# Altium PCB Altium_PCB_v03_CPU6502_4Plane.pcbdoc
Units mil, origin at the board's own origin, x right, y up, seen from the top; angles counter-clockwise.
Board outline 6299.21 x 6299.21 mil, 4 copper layers (Top Layer, GROUND, 5V, Bottom Layer); 26 components, 42 nets, 174 pads, 0 vias.
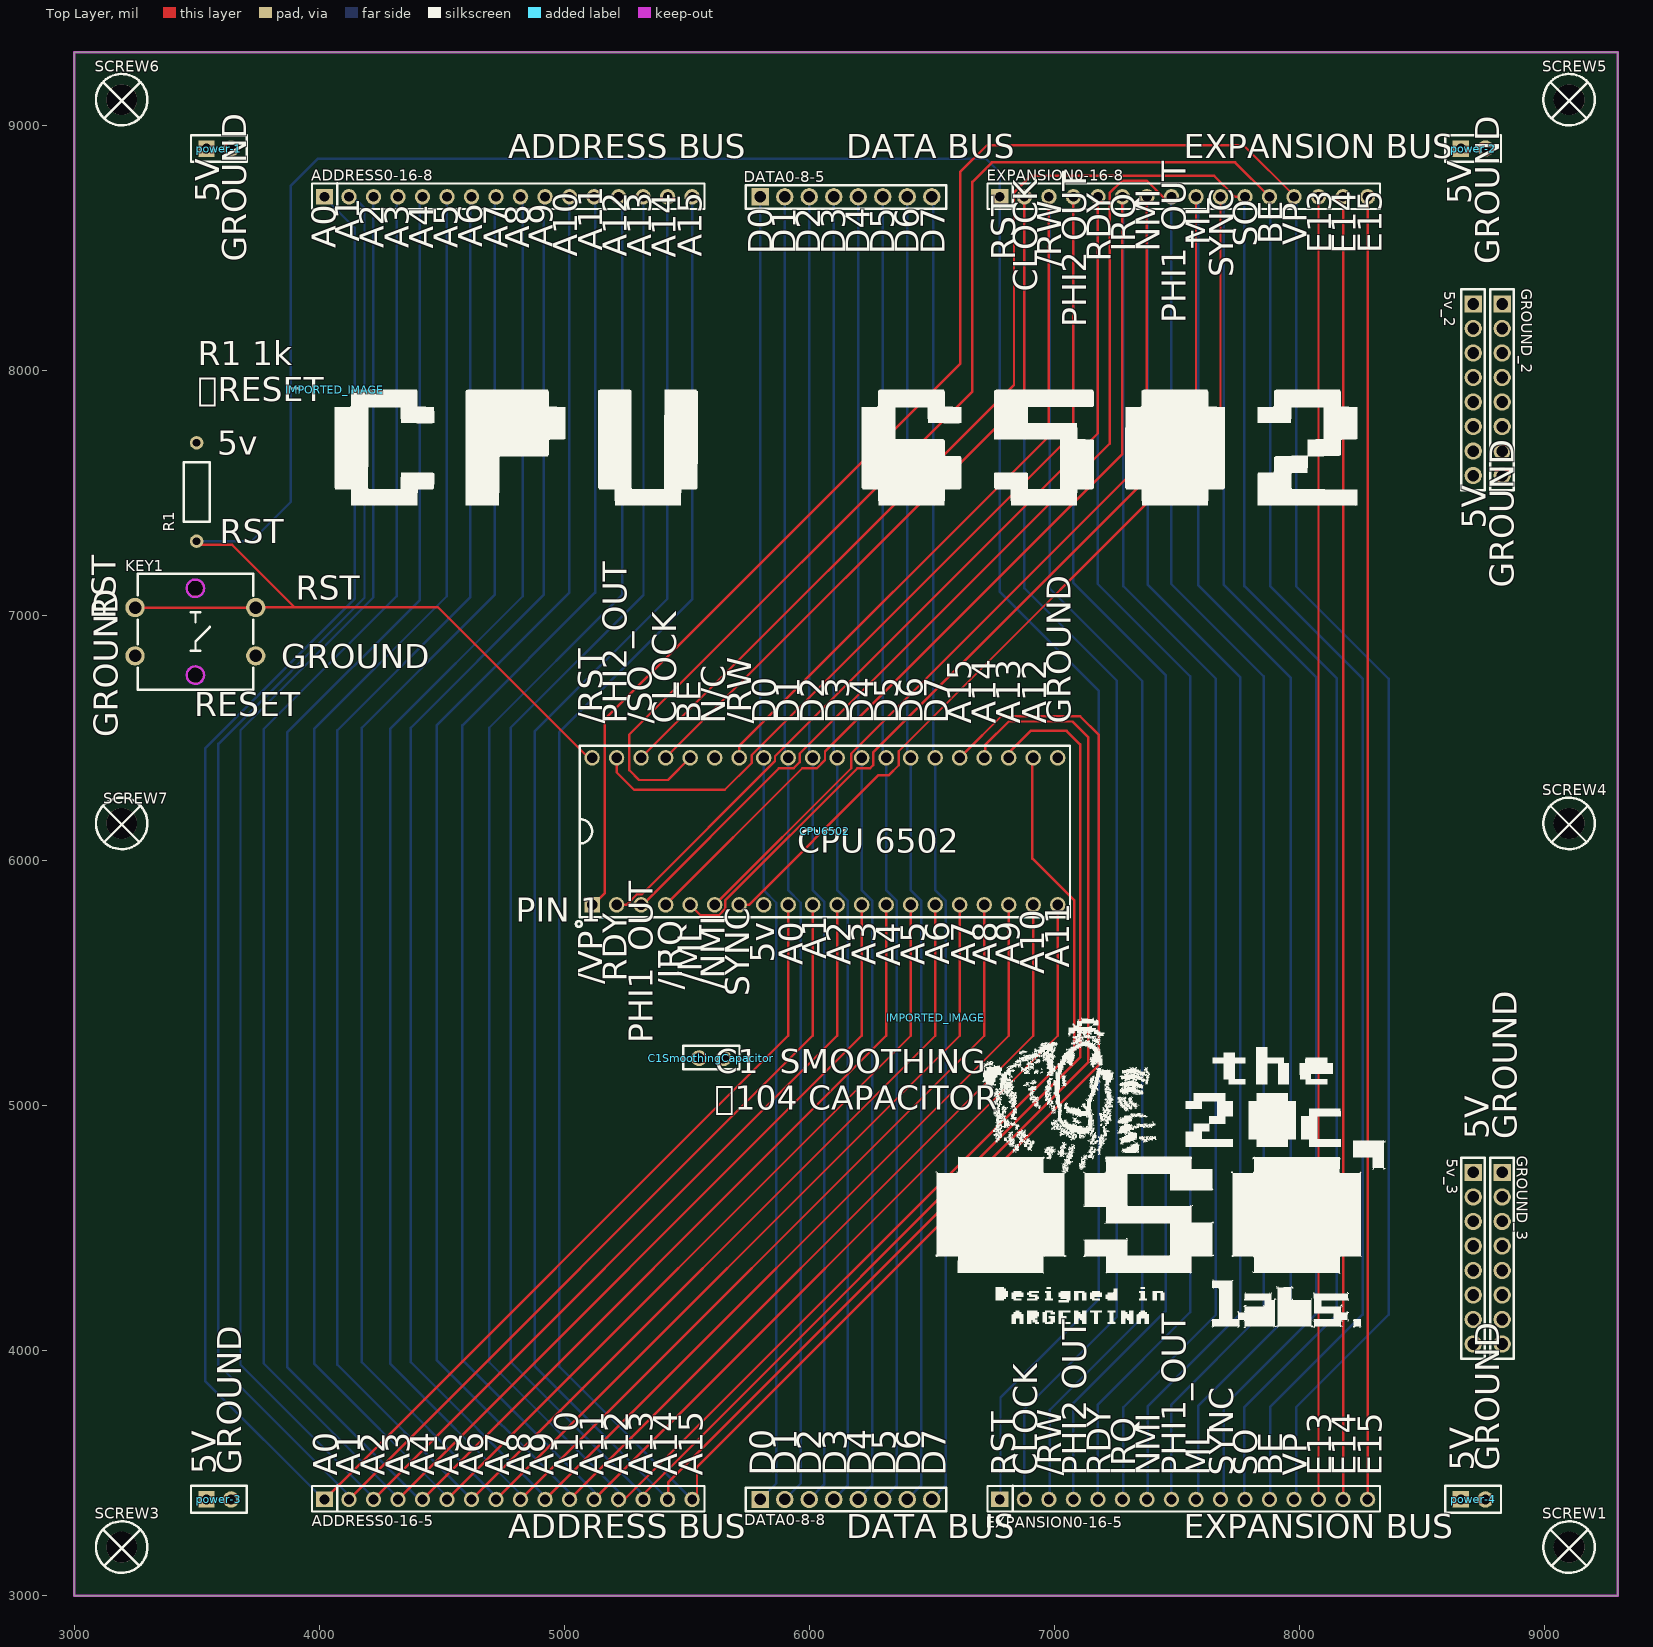
[diagram p0: Top Layer view]
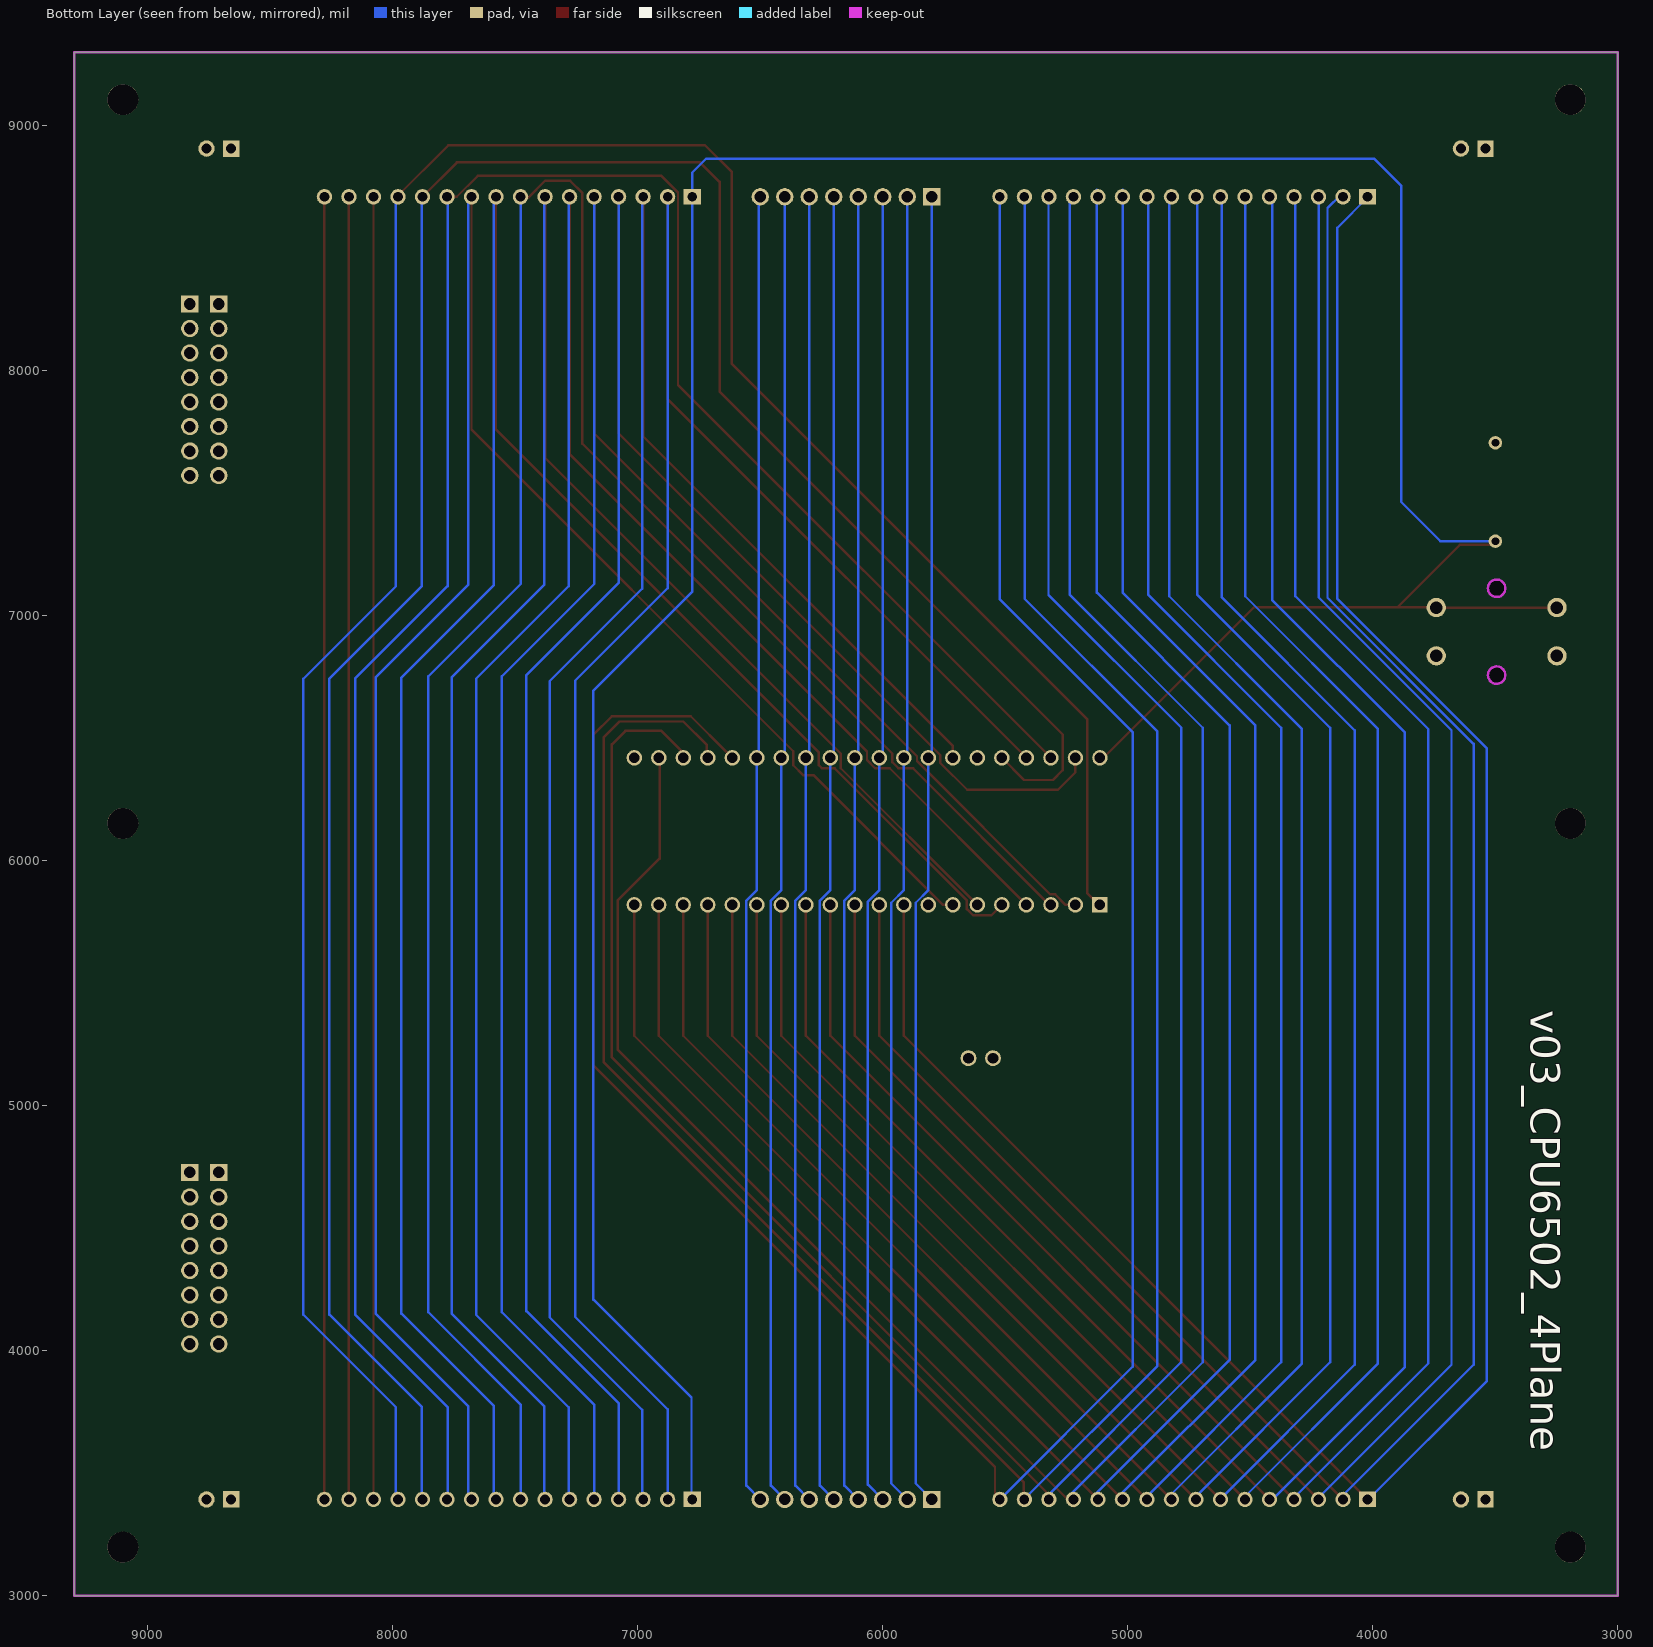
[diagram p1: Bottom Layer view, seen from below]
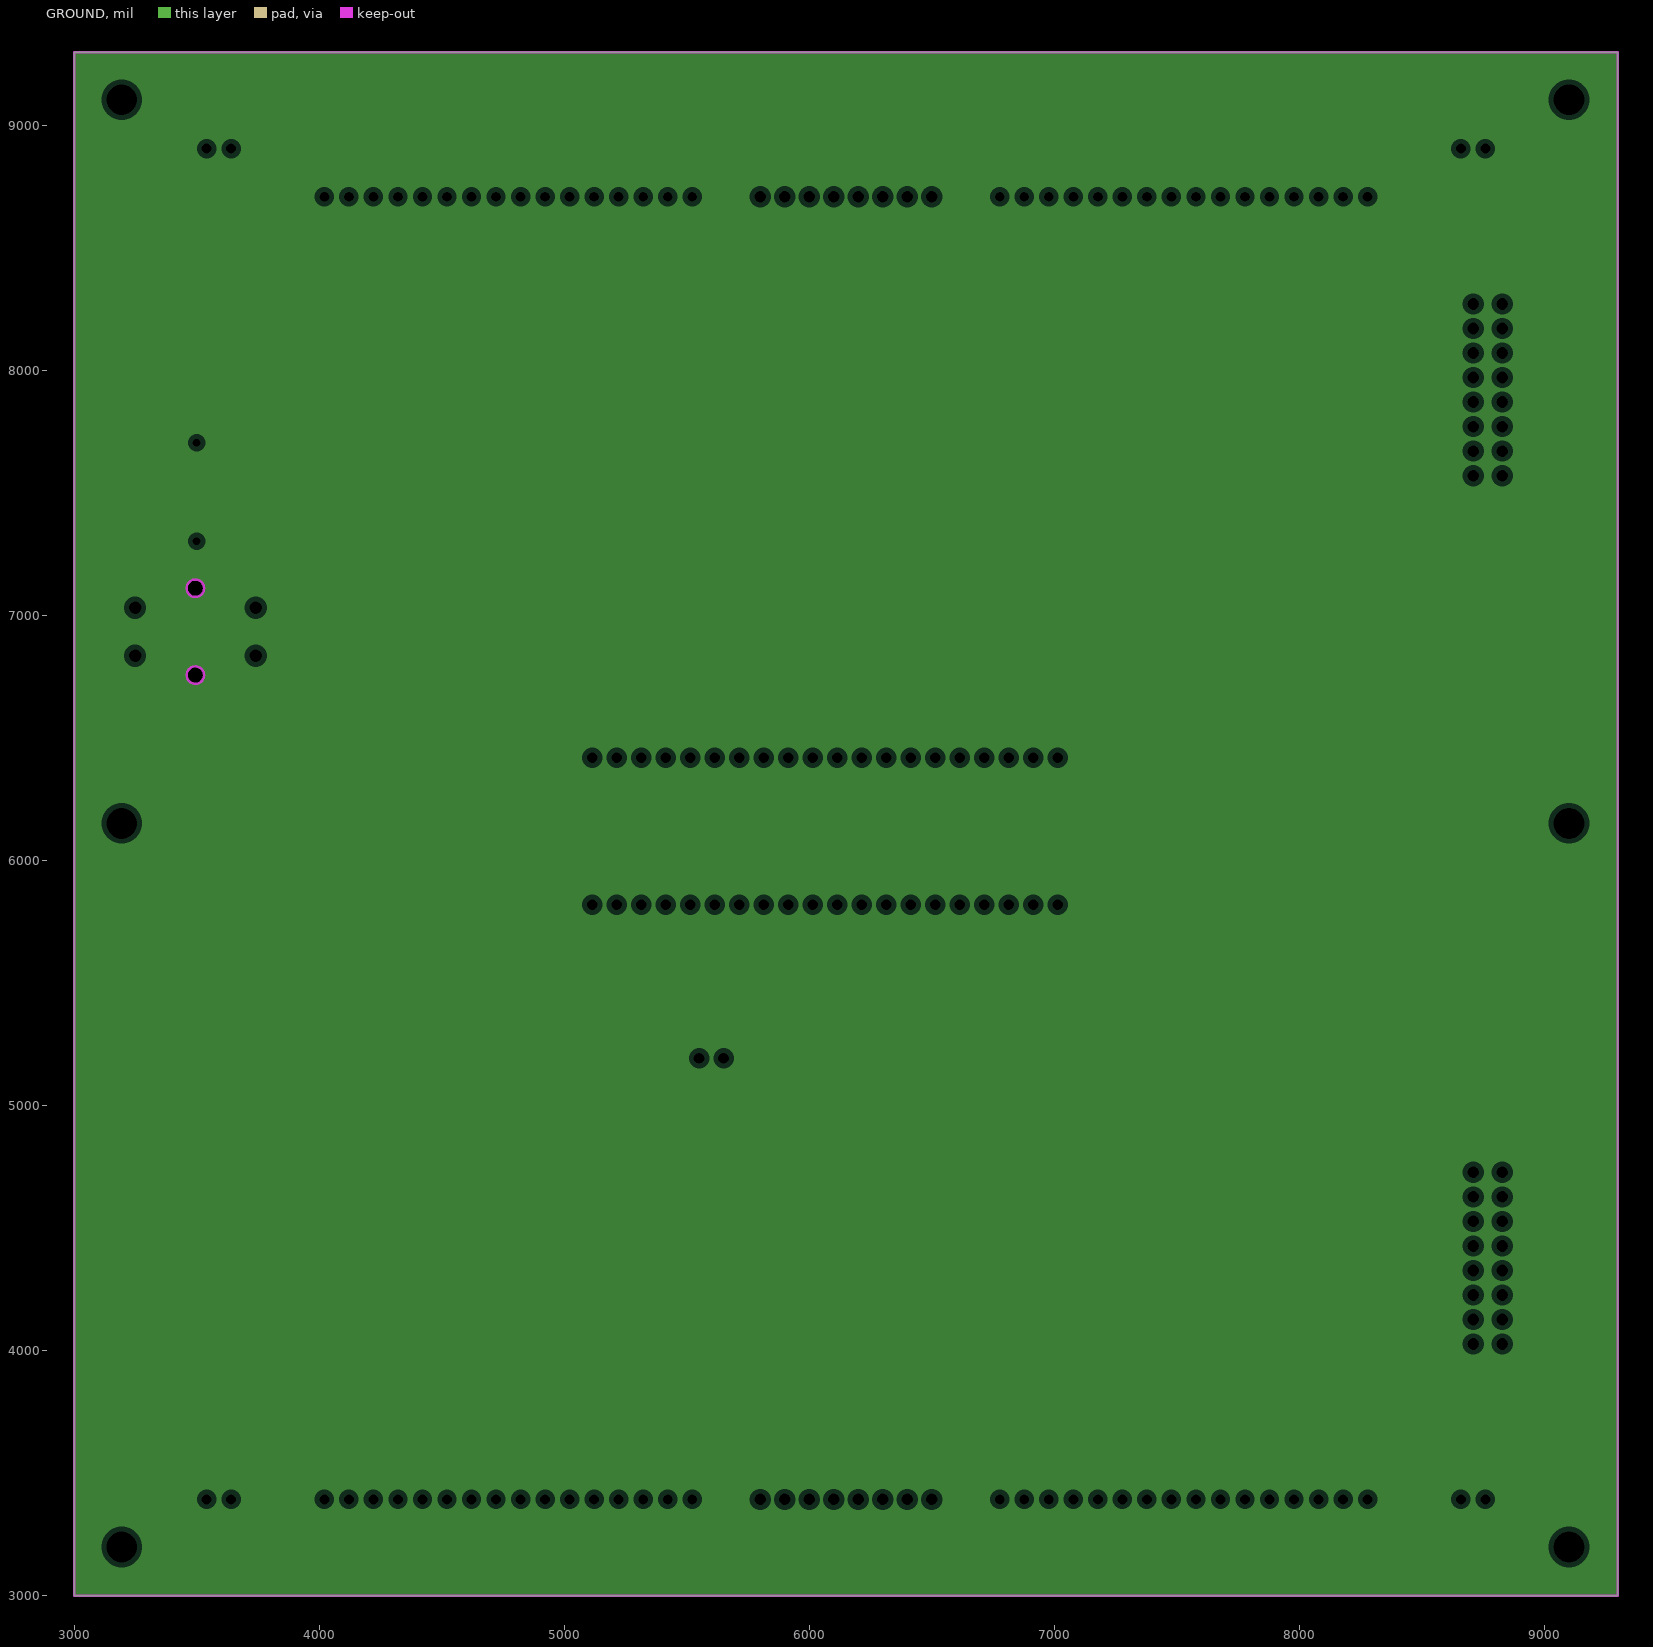
[diagram p2: GROUND, clearances drawn from the general rule]
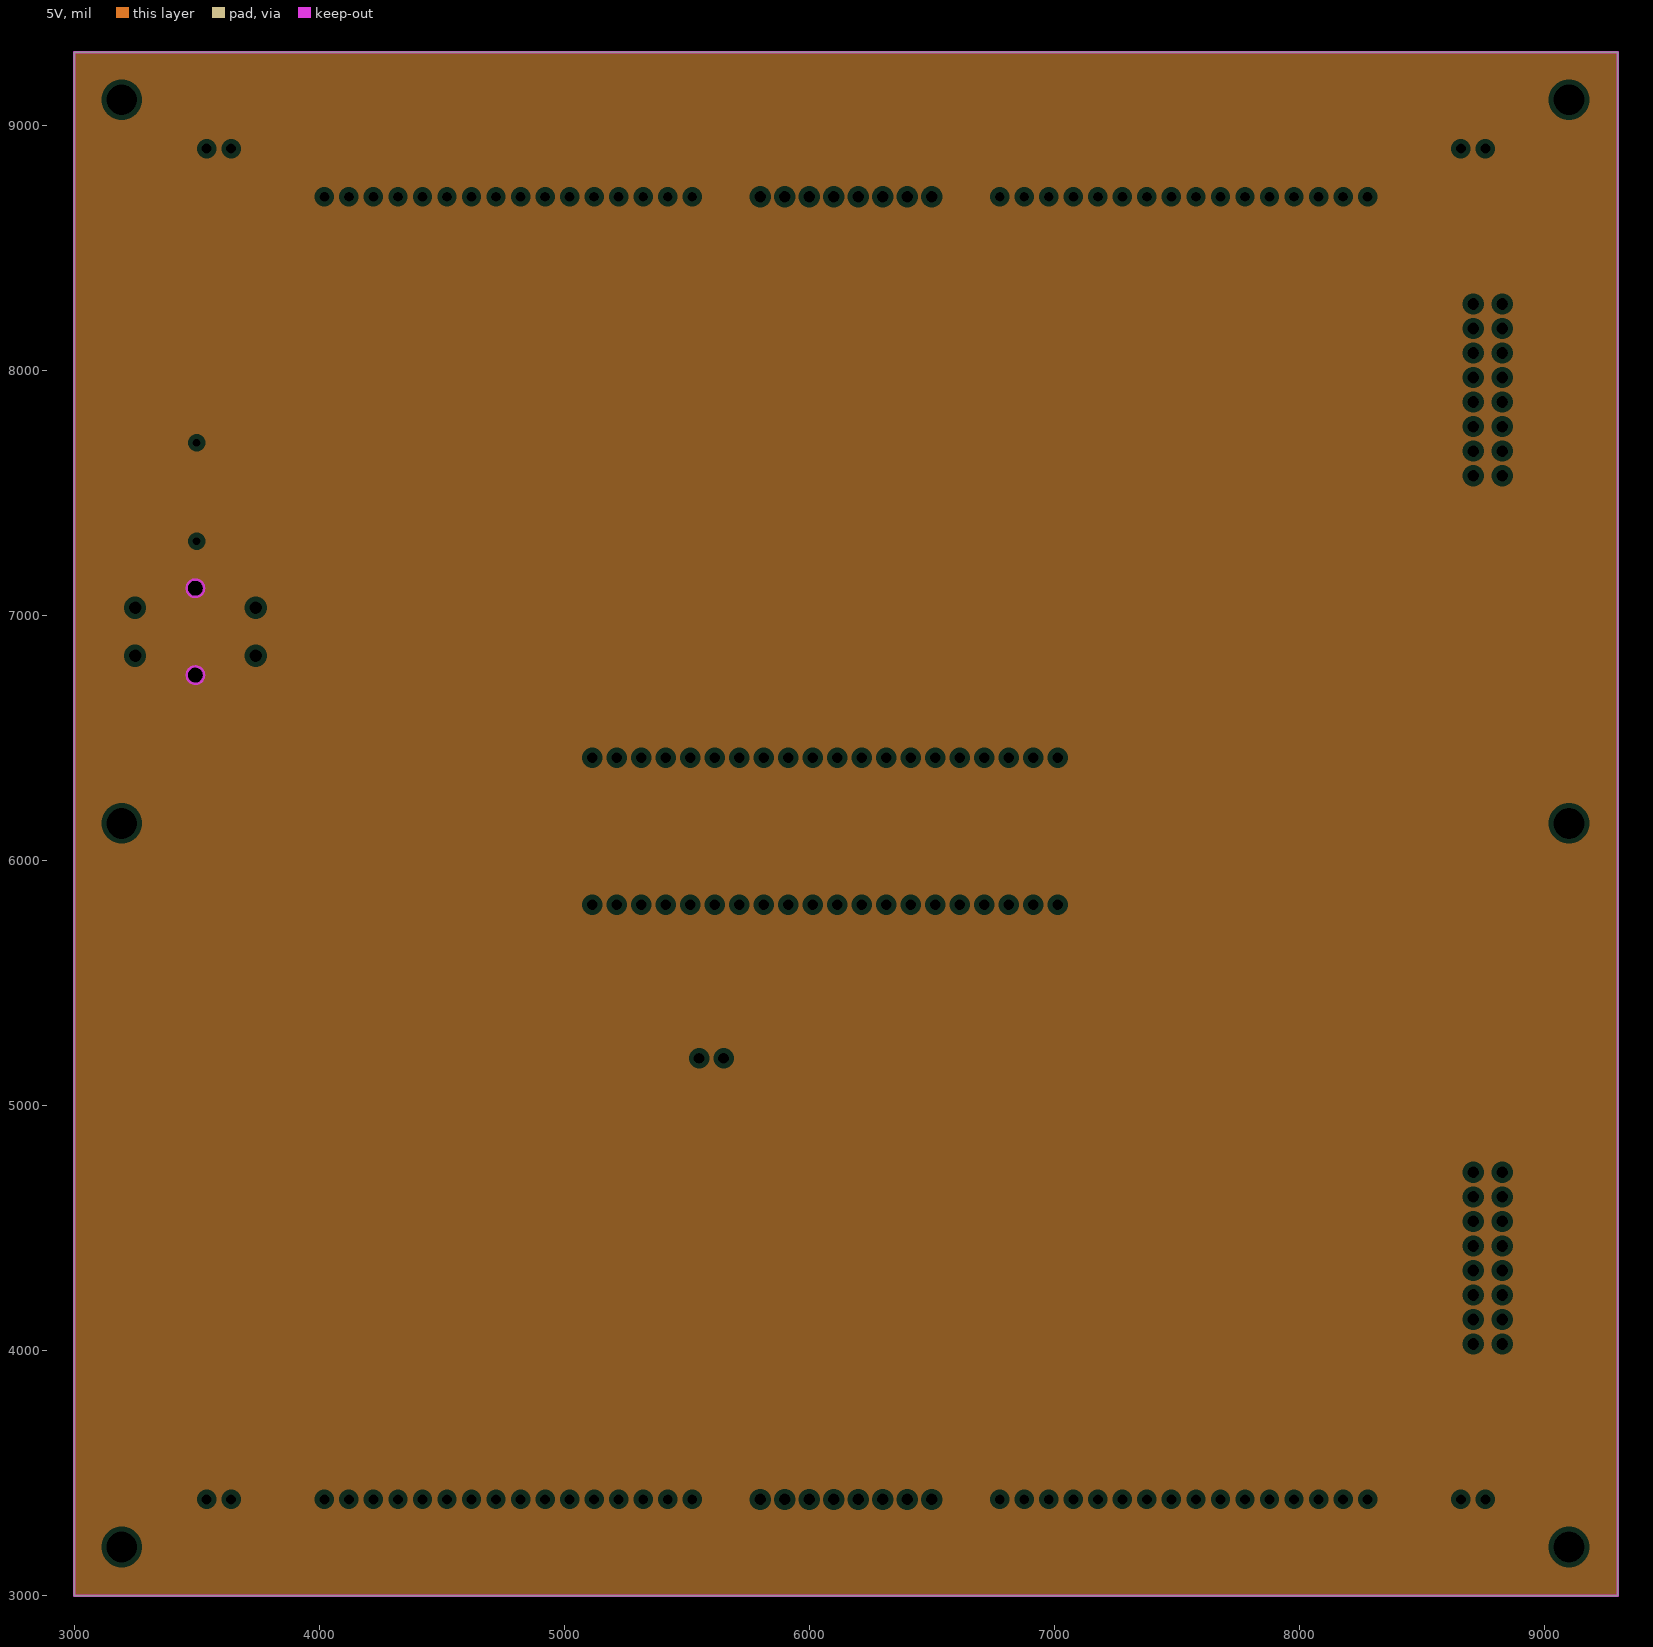
[diagram p3: 5V, clearances drawn from the general rule]

## Layer stack, top to bottom
Top Layer: signal copper (thickness not stored)
Dielectric: dielectric 12.6, FR-4, Dk 4.8
GROUND: plane copper (thickness not stored)
Dielectric: dielectric 12.6, FR-4, Dk 4.8
5V: plane copper (thickness not stored)
Dielectric: dielectric 12.6, FR-4, Dk 4.8
Bottom Layer: signal copper (thickness not stored)

## Board outline
3000,3000 9299.21,3000 9299.21,9299.21 3000,9299.21

## Design rules (kind name [scope] priority, off if disabled: settings)
Clearance copperThickness1oz [All] p1: gap=7 ignorepadtopadclearanceinfootprint=FALSE except(4: Track-Track; 6: Track-SMDPad SMDPad-SMDPad Track-THPad SMDPad-THPad THPad-THPad Track-Via SMDPad-Via THPad-Via Via-Via Track-Fill SMDPad-Fill THPad-Fill Via-Fill Fill-Fill SMDPad-Region THPad-Region Via-Region Fill-Region Region-Region Track-Poly SMDPad-Poly THPad-Poly Via-Poly Fill-Poly Poly-Poly Track-Text SMDPad-Text THPad-Text Via-Text Fill-Text Region-Text Poly-Text Text-Text Track-Hole SMDPad-Hole THPad-Hole Via-Hole Fill-Hole Region-Hole Poly-Hole Text-Hole; 11.8: Track-Region Region-Poly Track-Sheet SMDPad-Sheet THPad-Sheet Via-Sheet Fill-Sheet Region-Sheet Poly-Sheet Text-Sheet Sheet-Hole)
Clearance copperThickness2oz [All] p1: gap=7 ignorepadtopadclearanceinfootprint=FALSE except(6: Track-SMDPad SMDPad-SMDPad Track-THPad SMDPad-THPad THPad-THPad Track-Via SMDPad-Via THPad-Via Via-Via Track-Fill SMDPad-Fill THPad-Fill Via-Fill Fill-Fill SMDPad-Region THPad-Region Via-Region Fill-Region Region-Region Track-Poly SMDPad-Poly THPad-Poly Via-Poly Fill-Poly Poly-Poly Track-Text SMDPad-Text THPad-Text Via-Text Fill-Text Region-Text Poly-Text Text-Text Track-Hole SMDPad-Hole THPad-Hole Via-Hole Fill-Hole Region-Hole Poly-Hole Text-Hole; 8: Track-Track; 11.8: Track-Region Region-Poly Track-Sheet SMDPad-Sheet THPad-Sheet Via-Sheet Fill-Sheet Region-Sheet Poly-Sheet Text-Sheet Sheet-Hole)
DiffPairsRouting differentialPair [All] p1: maxuncoupledlength=10 maxlimit=5.9843 mostfreqgap=5.9843 toplayer_minwidth=5 toplayer_prefwidth=10 toplayer_maxwidth=100 bottomlayer_minwidth=5 bottomlayer_prefwidth=10 bottomlayer_maxwidth=100
PasteMaskExpansion pasteMaskExpansion [All] p1:
PlaneConnect innerPlane [All] p1: planeconnectstyle=Relief reliefexpansion=20 reliefentries=4 reliefconductorwidth=10 reliefairgap=10
PlaneConnect 5VPlane [All] p1: planeconnectstyle=Relief reliefexpansion=20 reliefentries=4 reliefconductorwidth=10 reliefairgap=10
PlaneConnect GroundPlane [All] p1: planeconnectstyle=Relief reliefexpansion=20 reliefentries=4 reliefconductorwidth=10 reliefairgap=10
PolygonConnect copperRegion [All] p1: connectstyle=Relief reliefentries=4 reliefconductorwidth=10 polygonreliefangle="90 Angle" airgapwidth=10
RoutingVias viaSize [All] p1: viastyle="Through Hole" holewidth=12.0078 minholewidth=11.811 maxholewidth=247.9922 width=24.0158 minwidth=19.685 maxwidth=393.7008
SolderMaskExpansion solderMaskExpansion [All] p1: useseparateexpansions=TRUE expansion=2.0079 expansionbottom=2.0079
Width copperThickness1oz [All] p1: maxlimit=100 minlimit=5 preferedwidth=10
Width copperThickness2oz [All] p1: maxlimit=100 minlimit=8 preferedwidth=10

## Components (designator, comment, footprint, x,y, rotation, side; value= is the part's Value field where it differs from the comment)
5v_2 "2.54-1*8P母环保" HDR-TH_8P-P2.54-V-F-1 8708.66,7921.26 r270 top
5v_3 "2.54-1*8P母环保" HDR-TH_8P-P2.54-V-F-1 8708.66,4377.95 r270 top
ADDRESS0-16-5 "PM254-1-16-Z-8.5" HDR-TH_16P-P2.54-V-F-A 4771.65,3393.7 r0 top
ADDRESS0-16-8 "PM254-1-16-Z-8.5" HDR-TH_16P-P2.54-V-F-A 4771.65,8708.66 r0 top
C1SmoothingCapacitor "CC1H104ZA1ED3F5P1100" CAP-TH_L5.8-W2.4-P2.54-D0.6 5600,5194.21 r180 top
CPU6502 "IC座-40P" DIP-40_L50.8-W17.8-P2.54-LS15.2-BL 6063.57,6119.74 r0 top
DATA0-8-5 "2.54-1*8P母环保" HDR-TH_8P-P2.54-V-F-1 6149.61,8708.66 r0 top
DATA0-8-8 "2.54-1*8P母环保" HDR-TH_8P-P2.54-V-F-1 6149.61,3393.7 r0 top
EXPANSION0-16-5 "PM254-1-16-Z-8.5" HDR-TH_16P-P2.54-V-F-A 7527.56,3393.7 r0 top
EXPANSION0-16-8 "PM254-1-16-Z-8.5" HDR-TH_16P-P2.54-V-F-A 7527.56,8708.66 r0 top
GROUND_2 "2.54-1*8P母环保" HDR-TH_8P-P2.54-V-F-1 8826.77,7921.26 r270 top
GROUND_3 "2.54-1*8P母环保" HDR-TH_8P-P2.54-V-F-1 8826.77,4377.95 r270 top
IMPORTED_IMAGE "IMPORTED_IMAGE" IMPORTED_IMAGE 4062.99,7921.26 r0 top
IMPORTED_IMAGE "IMPORTED_IMAGE" IMPORTED_IMAGE 6515,5359.21 r0 top
KEY1 "B3F-4055_C84931" KEY-TH_4P-L12.0-W12.0-P5.00-LS13.4-EH 3495,6934.21 r0 top
power-1 "2.54-1*2P母" HDR-TH_2P-P2.54-V-F 3590.55,8905.51 r0 top
power-2 "2.54-1*2P母" HDR-TH_2P-P2.54-V-F 8708.66,8905.51 r0 top
power-3 "2.54-1*2P母" HDR-TH_2P-P2.54-V-F 3590.55,3393.7 r0 top
power-4 "2.54-1*2P母" HDR-TH_2P-P2.54-V-F 8708.66,3393.7 r0 top
R1 "CR1/4W-1K±5%-ST26" RES-TH_BD2.7-L6.2-P10.20-D0.4 3500,7504.21 r90 top
SCREW1 "Screw-Hole-M3" Screw-Hole-M3 9102.36,3196.85 r0 top
SCREW3 "Screw-Hole-M3" Screw-Hole-M3 3196.85,3196.85 r0 top
SCREW4 "Screw-Hole-M3" Screw-Hole-M3 9102.36,6149.61 r0 top
SCREW5 "Screw-Hole-M3" Screw-Hole-M3 9102.36,9102.36 r0 top
SCREW6 "Screw-Hole-M3" Screw-Hole-M3 3196.85,9102.36 r0 top
SCREW7 "Screw-Hole-M3" Screw-Hole-M3 3196.85,6149.61 r0 top

## Footprints (in the part's own frame and the unit in brackets; to place one, negate y for a bottom-side part, rotate by r counter-clockwise, add the part's x,y. Pads: shape width x height; smd on the part's side, far side on the other; paste and mask are expansions set on the pad)
CAP-TH_L5.8-W2.4-P2.54-D0.6 [mm]
  round 1.65 hole 1.1: 1(-1.27,0) 2(1.27,0)
  silkscreen extent -2.92,-1.27 2.92,1.14
DIP-40_L50.8-W17.8-P2.54-LS15.2-BL [mm]
  rect 1.6x1.6 hole 1.1: 1(-24.13,-7.62)
  round 1.6 hole 1.1: 2(-21.59,-7.62) 3(-19.05,-7.62) 4(-16.51,-7.62) 5(-13.97,-7.62) 6(-11.43,-7.62) 7(-8.89,-7.62) 8(-6.35,-7.62) 9(-3.81,-7.62) 10(-1.27,-7.62) 11(1.27,-7.62) 12(3.81,-7.62) 13(6.35,-7.62) 14(8.89,-7.62) 15(11.43,-7.62) 16(13.97,-7.62) 17(16.51,-7.62) 18(19.05,-7.62) 19(21.59,-7.62) 20(24.13,-7.62) 21(24.125,7.62) 22(21.586,7.62) 23(19.045,7.62) 24(16.505,7.62) 25(13.965,7.62) 26(11.425,7.62) 27(8.885,7.62) 28(6.345,7.62) 29(3.81,7.62) 30(1.27,7.62) 31(-1.27,7.62) 32(-3.81,7.62) 33(-6.35,7.62) 34(-8.89,7.62) 35(-11.43,7.62) 36(-13.97,7.62) 37(-16.51,7.62) 38(-19.05,7.62) 39(-21.59,7.62) 40(-24.13,7.62)
  silkscreen extent -25.8,-9.9 25.4,8.89
HDR-TH_2P-P2.54-V-F [mm]
  rect 1.7x1.7 hole 1: 1(-1.27,0)
  round 1.7 hole 1: 2(1.27,0)
  silkscreen extent -2.88,-1.39 2.88,1.4
HDR-TH_8P-P2.54-V-F-1 [mm]
  rect 1.8x1.8 hole 1.2: 1(-8.89,0)
  round 1.8 hole 1.2: 2(-6.35,0) 3(-3.81,0) 4(-1.27,0) 5(1.27,0) 6(3.81,0) 7(6.35,0) 8(8.89,0)
  silkscreen extent -10.41,-1.22 10.41,1.22
HDR-TH_16P-P2.54-V-F-A [mm]
  rect 1.8x1.6 hole 1: 1(-19.05,0)
  round 1.6 hole 1: 2(-16.51,0) 3(-13.97,0) 4(-11.43,0) 5(-8.89,0) 6(-6.35,0) 7(-3.81,0) 8(-1.27,0) 9(1.27,0) 10(3.81,0) 11(6.35,0) 12(8.89,0) 13(11.43,0) 14(13.97,0) 15(16.51,0) 16(19.05,0)
  silkscreen extent -20.32,-1.27 20.32,1.4
IMPORTED_IMAGE [mil]
  silkscreen extent 0,-472 4173,0
KEY-TH_4P-L12.0-W12.0-P5.00-LS13.4-EH [mm]
  round 2 hole 1.3: 1(6.25,-2.5) 2(-6.25,-2.5) 3(6.25,2.5) 4(-6.25,2.5)
  Multi-Layer board cut-out: 0.9,4.5 0.777,4.946 0.448,5.273 0,5.392 -0.448,5.273 -0.777,4.947 -0.9,4.5 -0.9,4.5 -0.777,4.054 -0.448,3.728 0,3.608 0.448,3.727 0.777,4.054 0.9,4.5
  Multi-Layer board cut-out: 0.9,-4.5 0.777,-4.053 0.448,-3.727 0,-3.608 -0.448,-3.727 -0.777,-4.053 -0.9,-4.5 -0.9,-4.5 -0.777,-4.946 -0.448,-5.272 0,-5.392 0.448,-5.272 0.777,-4.946 0.9,-4.5
  Multi-Layer keep-out circle w0.254: c0,4.5 r0.9
  Multi-Layer keep-out circle w0.254: c0,-4.5 r0.9
  silkscreen extent -5.99,-6 6.01,6
RES-TH_BD2.7-L6.2-P10.20-D0.4 [mm]
  round 1.4 hole 0.8 copper offset 0,0: 1(-5.1,0) 2(5.1,0)
  silkscreen extent -3.1,-1.35 3.1,1.35
Screw-Hole-M3 [mil]
  round 126 hole 126: 1(-2.5,2.5)
  silkscreen extent -107,-102 102,107

## Nets (pads, with @x,y where several pads share a name; then routed paths per layer and width w, separated by ;. In a path a pad name is that pad's centre, name@x,y a point inside that pad or via, vN(x,y) a via of type N, cw(c..) or ccw(c..) an arc to the next point about the centre after c; other vN are vias at no path point)
5V: 5v_2.1 5v_2.2 5v_2.3 5v_2.4 5v_2.5 5v_2.6 5v_2.7 5v_2.8 5v_3.1 5v_3.2 5v_3.3 5v_3.4 5v_3.5 5v_3.6 5v_3.7 5v_3.8 C1SmoothingCapacitor.1 CPU6502.8 power-1.1 power-2.1 power-3.1 power-4.1 R1.2
A0: 
A1: ADDRESS0-16-5.2 ADDRESS0-16-8.2 CPU6502.10 | length 9018.3
  Top Layer w10: ADDRESS0-16-5.2 6013.57,5285.61 CPU6502.10
  Bottom Layer w10: ADDRESS0-16-5.2@4130.83,3401.73 3589.17,3943.39 3589.17,6476.72 4185,7072.55 4185,8662.52 ADDRESS0-16-8.2@4130.83,8716.69
A2: ADDRESS0-16-5.3 ADDRESS0-16-8.3 CPU6502.11 | length 8973.4
  Top Layer w10: ADDRESS0-16-5.3 6113.57,5285.61 CPU6502.11
  Bottom Layer w10: ADDRESS0-16-5.3@4220.83,3401.73 3679.17,3943.39 3679.17,6532.24 4220.83,7073.9 ADDRESS0-16-8.3@4220.83,8716.69
A3: ADDRESS0-16-5.4 ADDRESS0-16-8.4 CPU6502.12 | length 8973.4
  Top Layer w10: ADDRESS0-16-5.4 6213.57,5285.61 CPU6502.12
  Bottom Layer w10: ADDRESS0-16-5.4@4315.83,3406.73 3774.17,3948.39 3774.17,6537.24 4315.83,7078.9 ADDRESS0-16-8.4@4315.83,8721.69
A4: ADDRESS0-16-5.5 ADDRESS0-16-8.5 CPU6502.13 | length 8973.4
  Top Layer w10: ADDRESS0-16-5.5 6313.57,5285.61 CPU6502.13
  Bottom Layer w10: ADDRESS0-16-5.5@4410.83,3391.73 3869.17,3933.39 3869.17,6522.24 4410.83,7063.9 ADDRESS0-16-8.5@4410.83,8706.69
A5: ADDRESS0-16-5.6 ADDRESS0-16-8.6 CPU6502.14 | length 8960.7
  Top Layer w10: ADDRESS0-16-5.6 6413.57,5285.61 CPU6502.14
  Bottom Layer w10: ADDRESS0-16-5.6@4520.83,3406.73 3979.17,3948.39 3979.17,6537.24 4520.83,7078.9 4520.83,8707.83 ADDRESS0-16-8.6
A6: ADDRESS0-16-5.7 ADDRESS0-16-8.7 CPU6502.15 | length 8973.4
  Top Layer w10: ADDRESS0-16-5.7 6513.57,5285.61 CPU6502.15
  Bottom Layer w10: ADDRESS0-16-5.7@4615.83,3401.73 4074.17,3943.39 4074.17,6532.24 4615.83,7073.9 ADDRESS0-16-8.7@4615.83,8716.69
A7: ADDRESS0-16-5.8 ADDRESS0-16-8.8 CPU6502.16 | length 8973.4
  Top Layer w10: ADDRESS0-16-5.8 6613.57,5285.61 CPU6502.16
  Bottom Layer w10: ADDRESS0-16-5.8@4715.83,3411.73 4174.17,3953.39 4174.17,6542.24 4715.83,7083.9 ADDRESS0-16-8.8@4715.83,8726.69
A8: ADDRESS0-16-5.9 ADDRESS0-16-8.9 CPU6502.17 | length 8973.4
  Top Layer w10: ADDRESS0-16-5.9 6713.57,5285.61 CPU6502.17
  Bottom Layer w10: ADDRESS0-16-5.9@4830.83,3406.73 4289.17,3948.39 4289.17,6537.24 4830.83,7078.9 ADDRESS0-16-8.9@4830.83,8721.69
A9: ADDRESS0-16-5.10 ADDRESS0-16-8.10 CPU6502.18 | length 8973.4
  Top Layer w10: ADDRESS0-16-5.10 6813.57,5285.61 CPU6502.18
  Bottom Layer w10: ADDRESS0-16-5.10@4915.83,3411.73 4374.17,3953.39 4374.17,6542.24 4915.83,7083.9 ADDRESS0-16-8.10@4915.83,8726.69
A10: ADDRESS0-16-5.11 ADDRESS0-16-8.11 CPU6502.19 | length 8973.4
  Top Layer w10: ADDRESS0-16-5.11 6913.57,5285.61 CPU6502.19
  Bottom Layer w10: ADDRESS0-16-5.11@5020.83,3421.73 4479.17,3963.39 4479.17,6552.24 5020.83,7093.9 ADDRESS0-16-8.11@5020.83,8736.69
A11: ADDRESS0-16-5.12 ADDRESS0-16-8.12 CPU6502.20 | length 8973.4
  Top Layer w10: ADDRESS0-16-5.12 7013.57,5285.61 CPU6502.20
  Bottom Layer w10: ADDRESS0-16-5.12@5125.83,3421.73 4584.17,3963.39 4584.17,6552.24 5125.83,7093.9 ADDRESS0-16-8.12@5125.83,8736.69
A12: ADDRESS0-16-5.13 ADDRESS0-16-8.13 CPU6502.22 | length 9632.6
  Top Layer w10: ADDRESS0-16-5.13@5218.23,3366.58 7081.57,5229.93 7081.57,5837.09 6910,6008.66 CPU6502.22@6910,6392.62
  Bottom Layer w10: ADDRESS0-16-5.13@5235.83,3411.73 4694.17,3953.39 4694.17,6542.24 5235.83,7083.9 ADDRESS0-16-8.13@5235.83,8726.69
A13: ADDRESS0-16-5.14 ADDRESS0-16-8.14 CPU6502.23 | length 9928.5
  Top Layer w10: ADDRESS0-16-5.14@5316.65,3408.7 7105,5197.05 7105,6474.21 7050,6529.21 6902.84,6529.21 CPU6502.23@6808.37,6434.74
  Bottom Layer w10: ADDRESS0-16-5.14@5323.36,3412.26 4781.71,3953.91 4781.71,6542.77 5323.36,7084.43 ADDRESS0-16-8.14@5323.36,8727.22
A14: ADDRESS0-16-5.15 ADDRESS0-16-8.15 CPU6502.24 | length 10072.6
  Top Layer w10: ADDRESS0-16-5.15@5425.27,3417.32 5425.27,3464.48 7138.61,5177.83 7138.61,6502.83 7073.61,6567.83 6813.61,6567.83 6716.98,6471.19 CPU6502.24@6716.98,6443.35
  Bottom Layer w10: ADDRESS0-16-5.15@5420.83,3396.73 4879.17,3938.39 4879.17,6527.24 5420.83,7068.9 5420.83,8707.83 ADDRESS0-16-8.15
A15: ADDRESS0-16-5.16 ADDRESS0-16-8.16 CPU6502.25 | length 10182.4
  Top Layer w10: ADDRESS0-16-5.16@5541.65,3413.7 5541.65,3525.87 7180,5164.21 7180,6514.21 7105,6589.21 6782.84,6589.21 CPU6502.25@6633.37,6439.74
  Bottom Layer w10: ADDRESS0-16-5.16 4980,3935.35 4980,6524.21 5521.65,7065.87 ADDRESS0-16-8.16
BE: CPU6502.36 EXPANSION0-16-5.12 EXPANSION0-16-8.12 | length 10214.1
  Top Layer w10: CPU6502.36 5423.04,6329.21 5305,6329.21 5265,6369.21 5265,6514.21 6665,7914.21 6665,8769.21 6745,8849.21 7737.01,8849.21 EXPANSION0-16-8.12
  Bottom Layer w10: EXPANSION0-16-5.12@7880,3402.51 7880,3770.58 8257.44,4148.02 8257.44,6743.02 7880,7120.46 EXPANSION0-16-8.12@7880,8717.47
CLOCK: CPU6502.37 EXPANSION0-16-5.2 EXPANSION0-16-8.2 | length 8523
  Top Layer w10: CPU6502.37 6877.56,7883.73 EXPANSION0-16-8.2
  Bottom Layer w10: EXPANSION0-16-5.2 6877.56,3761.77 7255,4139.21 7255,6734.21 6877.56,7111.65 EXPANSION0-16-8.2
D0: CPU6502.33 DATA0-8-5.1 DATA0-8-8.1 | length 5369.1
  Bottom Layer w10: DATA0-8-8.1 5865,3459.09 5865,5828.41 5813.57,5879.84 CPU6502.33 5799.61,6433.7 DATA0-8-5.1
D1: CPU6502.32 DATA0-8-5.2 DATA0-8-8.2 | length 5369.1
  Bottom Layer w10: DATA0-8-8.2 5965,3459.09 5965,5828.41 5913.57,5879.84 CPU6502.32 5899.61,6433.7 DATA0-8-5.2
D2: CPU6502.31 DATA0-8-5.3 DATA0-8-8.3 | length 5365
  Bottom Layer w10: DATA0-8-8.3 6060,3454.09 6060,5833.41 6013.57,5879.84 CPU6502.31 5999.61,6433.7 DATA0-8-5.3
D3: CPU6502.30 DATA0-8-5.4 DATA0-8-8.4 | length 5361.7
  Bottom Layer w10: DATA0-8-8.4 6156.07,3450.17 6156.07,5837.35 6113.57,5879.85 CPU6502.30 6099.61,6433.7 DATA0-8-5.4
D4: CPU6502.29 DATA0-8-5.5 DATA0-8-8.5 | length 5361.7
  Bottom Layer w10: DATA0-8-8.5 6256.07,3450.17 6256.07,5837.35 6213.57,5879.85 CPU6502.29 6199.61,6433.7 DATA0-8-5.5
D5: CPU6502.28 DATA0-8-5.6 DATA0-8-8.6 | length 5361.7
  Bottom Layer w10: DATA0-8-8.6 6356.07,3450.17 6356.07,5837.35 6313.37,5880.05 CPU6502.28 6299.61,6433.5 DATA0-8-5.6
D6: CPU6502.27 DATA0-8-5.7 DATA0-8-8.7 | length 5361.7
  Bottom Layer w10: DATA0-8-8.7 6456.07,3450.17 6456.07,5837.35 6413.37,5880.05 CPU6502.27 6399.61,6433.5 DATA0-8-5.7
D7: CPU6502.26 DATA0-8-5.8 DATA0-8-8.8 | length 5365.6
  Bottom Layer w10: DATA0-8-8.8 6556.07,3450.17 6556.07,5837.35 6513.37,5880.05 CPU6502.26 ; DATA0-8-5.8@6509.61,8708.66 6504.9,8703.96 6504.9,6438.2 CPU6502.26@6523.37,6419.74
E13: EXPANSION0-16-5.14 EXPANSION0-16-8.14 | length 5315
  Top Layer w10: EXPANSION0-16-5.14 EXPANSION0-16-8.14
E14: EXPANSION0-16-5.15 EXPANSION0-16-8.15 | length 5315
  Top Layer w10: EXPANSION0-16-5.15 EXPANSION0-16-8.15
E15: EXPANSION0-16-5.16 EXPANSION0-16-8.16 | length 5315
  Top Layer w10: EXPANSION0-16-5.16 EXPANSION0-16-8.16
GROUND: C1SmoothingCapacitor.2 CPU6502.21 GROUND_2.1 GROUND_2.2 GROUND_2.3 GROUND_2.4 GROUND_2.5 GROUND_2.6 GROUND_2.7 GROUND_2.8 GROUND_3.1 GROUND_3.2 GROUND_3.3 GROUND_3.4 GROUND_3.5 GROUND_3.6 GROUND_3.7 GROUND_3.8 KEY1.1 KEY1.2 power-1.2 power-2.2 power-3.2 power-4.2
IRQ: CPU6502.4 EXPANSION0-16-5.6 EXPANSION0-16-8.6 | length 9323.9
  Top Layer w10: CPU6502.4 5971.07,6377.24 6031.17,6377.24 6064,6410.07 6064,6445.28 7277.56,7658.84 EXPANSION0-16-8.6
  Bottom Layer w10: EXPANSION0-16-5.6@7281.28,3401.73 7281.28,3769.8 7658.72,4147.24 7658.72,6742.24 7281.28,7119.69 EXPANSION0-16-8.6@7281.28,8716.69
ML: CPU6502.5 EXPANSION0-16-5.9 EXPANSION0-16-8.9 | length 9531
  Top Layer w10: CPU6502.5 5556.06,5777.24 5631.17,5777.24 5656.06,5802.14 5656.06,5837.34 6195.96,6377.24 6248.03,6377.24 6260,6389.21 6260,6441.28 7577.56,7758.84 EXPANSION0-16-8.9
  Bottom Layer w10: EXPANSION0-16-5.9@7586.28,3406.73 7586.28,3774.8 7963.72,4152.24 7963.72,6747.24 7586.28,7124.69 EXPANSION0-16-8.9@7586.28,8721.69
NMI: CPU6502.6 EXPANSION0-16-5.7 EXPANSION0-16-8.7 | length 9247.2
  Top Layer w10: CPU6502.6 6171.07,6377.24 6171.07,6437.34 7377.56,7643.83 EXPANSION0-16-8.7
  Bottom Layer w10: EXPANSION0-16-5.7@7381.28,3406.73 7381.28,3774.8 7758.72,4152.24 7758.72,6747.24 7381.28,7124.69 EXPANSION0-16-8.7@7381.28,8721.69
PHI1_OUT: CPU6502.3 EXPANSION0-16-5.8 EXPANSION0-16-8.8 | length 9601.3
  Top Layer w10: CPU6502.3@5318.57,5819.74 5876.07,6377.24 5936.17,6377.24 5961.06,6402.14 5961.06,6437.34 7225,7701.28 7225,8724.21 7275,8774.21 7377.11,8774.21 EXPANSION0-16-8.8@7447.11,8704.21
  Bottom Layer w10: EXPANSION0-16-5.8@7476.28,3411.73 7476.28,3779.8 7853.72,4157.24 7853.72,6752.24 7476.28,7129.69 EXPANSION0-16-8.8@7476.28,8699.21
PHI2_OUT: CPU6502.39 EXPANSION0-16-5.4 EXPANSION0-16-8.4 | length 9166.5
  Top Layer w10: CPU6502.39 5213.57,6360.65 5285,6289.21 5655,6289.21 5764.95,6399.16 5764.95,6431.22 7077.56,7743.83 EXPANSION0-16-8.4
  Bottom Layer w10: EXPANSION0-16-5.4@7076.28,3416.73 7076.28,3784.8 7453.72,4162.24 7453.72,6757.24 7076.28,7134.69 EXPANSION0-16-8.4@7076.28,8731.69
RDY: CPU6502.2 EXPANSION0-16-5.5 EXPANSION0-16-8.5 | length 9365.3
  Top Layer w10: CPU6502.2 5253.47,5819.74 5295.96,5862.24 5316.16,5862.24 5860,6406.07 5860,6426.27 7177.56,7743.83 EXPANSION0-16-8.5
  Bottom Layer w10: EXPANSION0-16-5.5@7176.28,3411.73 7176.28,3779.8 7553.72,4157.24 7553.72,6752.24 7176.28,7129.69 EXPANSION0-16-8.5@7176.28,8726.69
RST: CPU6502.40 EXPANSION0-16-5.1 EXPANSION0-16-8.1 KEY1.3 KEY1.4 R1.1 | length 13081.2
  Top Layer w10: KEY1.4 KEY1.3 3742.64,7034.21 3900,7034.21 ; R1.1 3514.21,7289.21 3645,7289.21 3900,7034.21 ; CPU6502.40 5099.47,6419.74 4485,7034.21 3900,7034.21
  Bottom Layer w10: R1.1 3724.21,7303.42 3885,7464.21 3885,8754.21 3995,8864.21 6720,8864.21 6777.56,8806.65 EXPANSION0-16-8.1 6777.56,7096.65 7180,6694.21 7180,4209.21 6780,3809.21 6780,3396.14 EXPANSION0-16-5.1
RW: CPU6502.34 EXPANSION0-16-5.3 EXPANSION0-16-8.3 | length 8440.1
  Top Layer w10: CPU6502.34 5713.57,6467.78 6977.56,7731.77 EXPANSION0-16-8.3
  Bottom Layer w10: EXPANSION0-16-5.3@6981.28,3391.73 6981.28,3759.8 7358.72,4137.24 7358.72,6732.24 6981.28,7109.69 EXPANSION0-16-8.3@6981.28,8706.69
SO: CPU6502.38 EXPANSION0-16-5.11 EXPANSION0-16-8.11 | length 9570.5
  Top Layer w10: CPU6502.38 6835.06,7941.24 6835.06,8726.26 6903.01,8794.21 7652.11,8794.21 7737.66,8708.66 EXPANSION0-16-8.11
  Bottom Layer w10: EXPANSION0-16-5.11@7775,3402.51 7775,3770.58 8152.44,4148.02 8152.44,6743.02 7775,7120.46 EXPANSION0-16-8.11@7775,8717.47
SYNC: CPU6502.7 EXPANSION0-16-5.10 EXPANSION0-16-8.10 | length 9378.1
  Top Layer w10: CPU6502.7 5753.47,5819.74 6282.94,6349.21 6325,6349.21 6365,6389.21 6365,6446.48 7677.56,7759.04 EXPANSION0-16-8.10
  Bottom Layer w10: EXPANSION0-16-5.10@7691.28,3406.73 7691.28,3774.8 8068.72,4152.24 8068.72,6747.24 7691.28,7124.69 EXPANSION0-16-8.10@7691.28,8721.69
VP: CPU6502.1 EXPANSION0-16-5.13 EXPANSION0-16-8.13 | length 10737.3
  Top Layer w10: CPU6502.1@5118.57,5819.74 5165,5866.17 5165,6576.74 6615,8026.74 6615,8809.21 6725,8919.21 7772.01,8919.21 EXPANSION0-16-8.13@7982.56,8708.66
  Bottom Layer w10: EXPANSION0-16-5.13@7986.28,3401.73 7986.28,3769.8 8363.72,4147.24 8363.72,6742.24 7986.28,7119.69 EXPANSION0-16-8.13@7986.28,8716.69
pads on no net: ADDRESS0-16-5.1 ADDRESS0-16-8.1 CPU6502.9 CPU6502.35 SCREW1.1 SCREW3.1 SCREW4.1 SCREW5.1 SCREW6.1 SCREW7.1
copper on no net: | length 9030
  Top Layer w10: 4021.65,3393.7 5913.57,5285.61 5913.57,5819.74
  Bottom Layer w10: 4020.83,3391.73 3535,3877.56 3535,6457.84 4145,7067.84 4145,8582.52 4020.83,8706.69

## Keep-outs
Board Outline Layer:
  the board outline again, w10

## Silkscreen, mask and mechanical layers (free items; w line width, h text height)
Top Silkscreen Layer:
  text "ADDRESS BUS" at 4771.65,8866.14 h98.43
  text "DATA BUS" at 6149.61,8866.14 h98.43
  text "EXPANSION BUS" at 7527.56,8866.14 h98.43
  text "5V" at 3591.71,8685.61 h98.43 r90
  text "5V" at 8700,8679.21 h98.43 r90
  text "A1" at 4162.96,8524.56 h98.43 r90
  text "BE" at 7930.46,8514.06 h98.43 r90
  text "ML" at 7632.96,8511.26 h98.43 r90
  text "VP" at 8030.46,8511.26 h98.43 r90
  text "SO" at 7827.96,8505.56 h98.43 r90
  text "A6" at 4665.46,8501.96 h98.43 r90
  text "A9" at 4952.96,8501.96 h98.43 r90
  text "A0" at 4067.96,8499.16 h98.43 r90
  text "A2" at 4262.96,8499.16 h98.43 r90
  text "A3" at 4365.46,8499.16 h98.43 r90
  text "A5" at 4565.46,8499.16 h98.43 r90
  text "A7" at 4770.46,8499.16 h98.43 r90
  text "A8" at 4857.96,8499.16 h98.43 r90
  text "A4" at 4465.46,8496.36 h98.43 r90
  text "A11" at 5155.46,8488.86 h98.43 r90
  text "IRQ" at 7330.46,8484.06 h98.43 r90
  text "NMI" at 7430.46,8483.96 h98.43 r90
  text "E13" at 8130.46,8478.46 h98.43 r90
  text "E15" at 8335.46,8478.46 h98.43 r90
  text "E14" at 8230.46,8475.66 h98.43 r90
  text "D0" at 5849.21,8475.16 h98.43 r90
  text "D1" at 5944.21,8475.16 h98.43 r90
  text "D2" at 6044.21,8475.16 h98.43 r90
  text "D3" at 6146.71,8475.16 h98.43 r90
  text "D4" at 6246.71,8475.16 h98.43 r90
  text "D5" at 6346.71,8475.16 h98.43 r90
  text "D6" at 6446.71,8475.16 h98.43 r90
  text "D7" at 6551.71,8475.16 h98.43 r90
  text "A10" at 5052.96,8463.46 h98.43 r90
  text "A12" at 5255.46,8463.46 h98.43 r90
  text "A13" at 5355.46,8463.46 h98.43 r90
  text "A15" at 5560.46,8463.46 h98.43 r90
  text "A14" at 5455.46,8460.66 h98.43 r90
  text "RST" at 6840,8450.16 h98.43 r90
  text "RDY" at 7230.46,8444.46 h98.43 r90
  text "GROUND" at 3701.71,8443.41 h98.43 r90
  text "GROUND" at 8815,8434.21 h98.43 r90
  text "/RW" at 7027.96,8421.86 h98.43 r90
  text "SYNC" at 7730,8380.56 h98.43 r90
  text "CLOCK" at 6930,8322.26 h98.43 r90
  text "PHI1_OUT" at 7535,8192.56 h98.43 r90
  text "PHI2 OUT" at 7130,8176.26 h98.43 r90
  text "R1 1k  /  RESET" at 3505,7874.21 h98.43
  text "5v" at 3584.22,7655.41 h98.43
  text "5V" at 8760,7354.21 h98.43 r90
  text "RST" at 3593.45,7295 h98.43
  text "GROUND" at 8875,7114.21 h98.43 r90
  text "RST" at 3905.1,7065 h98.43
  text "RST" at 3170,6984.21 h98.43 r90
  text "GROUND" at 3845.1,6785 h98.43
  text "RESET" at 3490,6589.21 h98.43
  text "/RST" at 5154.99,6557.92 h98.43 r90
  text "PHI2_OUT" at 5254.99,6557.92 h98.43 r90
  text "/SO" at 5357.49,6557.92 h98.43 r90
  text "CLOCK" at 5457.49,6557.92 h98.43 r90
  text "BE" at 5557.49,6557.92 h98.43 r90
  text "N/C" at 5657.49,6557.92 h98.43 r90
  text "/RW" at 5762.49,6557.92 h98.43 r90
  text "D0" at 5864.99,6557.92 h98.43 r90
  text "D1" at 5959.99,6557.92 h98.43 r90
  text "D2" at 6059.99,6557.92 h98.43 r90
  text "D3" at 6162.49,6557.92 h98.43 r90
  text "D4" at 6262.49,6557.92 h98.43 r90
  text "D5" at 6362.49,6557.92 h98.43 r90
  text "D6" at 6462.49,6557.92 h98.43 r90
  text "D7" at 6567.49,6557.92 h98.43 r90
  text "A15" at 6661.24,6557.92 h98.43 r90
  text "A14" at 6761.24,6557.92 h98.43 r90
  text "A13" at 6861.24,6557.92 h98.43 r90
  text "A12" at 6966.24,6557.92 h98.43 r90
  text "GROUND" at 7065.78,6557.92 h98.43 r90
  text "GROUND" at 3179.21,6503.41 h98.43 r90
  text "CPU 6502" at 5950.38,6033.32 h98.43
  text "PIN 1" at 4801.6,5750 h98.43
  text "A1" at 6068.74,5598.28 h98.43 r90
  text "5v" at 5856.24,5584.08 h98.43 r90
  text "A6" at 6571.24,5575.68 h98.43 r90
  text "A9" at 6858.74,5575.68 h98.43 r90
  text "A0" at 5973.74,5572.88 h98.43 r90
  text "A2" at 6168.74,5572.88 h98.43 r90
  text "A3" at 6271.24,5572.88 h98.43 r90
  text "A5" at 6471.24,5572.88 h98.43 r90
  text "A7" at 6676.24,5572.88 h98.43 r90
  text "A8" at 6763.74,5572.88 h98.43 r90
  text "A4" at 6371.24,5570.08 h98.43 r90
  text "A11" at 7061.24,5562.58 h98.43 r90
  text "A10" at 6958.74,5537.18 h98.43 r90
  text "RDY" at 5255.78,5506.68 h98.43 r90
  text "/ML" at 5560.78,5500.98 h98.43 r90
  text "/VP" at 5155.78,5495.38 h98.43 r90
  text "/IRQ" at 5480.78,5473.78 h98.43 r90
  text "/NMI" at 5655.78,5473.78 h98.43 r90
  text "SYNC" at 5755.78,5447.78 h98.43 r90
  text "PHI1_OUT" at 5360.78,5254.78 h98.43 r90
  text "C1  SMOOTHING /  104 CAPACITOR" at 5615,4984.21 h98.43
  text "5V" at 8771.71,4863.41 h98.43 r90
  text "GROUND" at 8886.71,4863.41 h98.43 r90
  text "5V" at 8710.37,3511.61 h98.43 r90
  text "GROUND" at 8815.37,3511.61 h98.43 r90
  text "5V" at 3577.26,3495.5 h98.43 r90
  text "GROUND" at 3682.26,3495.5 h98.43 r90
  text "A0" at 4072.96,3490.66 h98.43 r90
  text "A1" at 4167.96,3490.66 h98.43 r90
  text "A2" at 4267.96,3490.66 h98.43 r90
  text "A3" at 4370.46,3490.66 h98.43 r90
  text "A4" at 4470.46,3490.66 h98.43 r90
  text "A5" at 4570.46,3490.66 h98.43 r90
  text "A6" at 4670.46,3490.66 h98.43 r90
  text "A7" at 4775.46,3490.66 h98.43 r90
  text "A8" at 4862.96,3490.66 h98.43 r90
  text "A9" at 4957.96,3490.66 h98.43 r90
  text "A10" at 5057.96,3490.66 h98.43 r90
  text "A11" at 5160.46,3490.66 h98.43 r90
  text "A12" at 5260.46,3490.66 h98.43 r90
  text "A13" at 5360.46,3490.66 h98.43 r90
  text "A14" at 5460.46,3490.66 h98.43 r90
  text "A15" at 5565.46,3490.66 h98.43 r90
  text "RST" at 6840,3491.26 h98.43 r90
  text "CLOCK" at 6930,3491.26 h98.43 r90
  text "/RW" at 7027.96,3491.26 h98.43 r90
  text "PHI2 OUT" at 7130,3491.26 h98.43 r90
  text "RDY" at 7230.46,3491.26 h98.43 r90
  text "IRQ" at 7330.46,3491.26 h98.43 r90
  text "NMI" at 7430.46,3491.26 h98.43 r90
  text "PHI1_OUT" at 7535,3491.26 h98.43 r90
  text "ML" at 7632.96,3491.26 h98.43 r90
  text "SYNC" at 7730,3491.26 h98.43 r90
  text "SO" at 7827.96,3491.26 h98.43 r90
  text "BE" at 7930.46,3491.26 h98.43 r90
  text "VP" at 8030.46,3491.26 h98.43 r90
  text "E13" at 8130.46,3491.26 h98.43 r90
  text "E14" at 8230.46,3491.26 h98.43 r90
  text "E15" at 8335.46,3491.26 h98.43 r90
  text "D0" at 5854.21,3490.16 h98.43 r90
  text "D1" at 5949.21,3490.16 h98.43 r90
  text "D2" at 6049.21,3490.16 h98.43 r90
  text "D3" at 6151.71,3490.16 h98.43 r90
  text "D4" at 6251.71,3490.16 h98.43 r90
  text "D5" at 6351.71,3490.16 h98.43 r90
  text "D6" at 6451.71,3490.16 h98.43 r90
  text "D7" at 6556.71,3490.16 h98.43 r90
  text "ADDRESS BUS" at 4771.65,3236.22 h98.43
  text "DATA BUS" at 6149.61,3236.22 h98.43
  text "EXPANSION BUS" at 7527.56,3236.22 h98.43
Bottom Silkscreen Layer:
  text "v03_CPU6502_4Plane" at 3355,5389.21 h120 r90